# Altium PCB PCB1.PcbDoc
Units mm, origin at the board's own origin, x right, y up, seen from the top; angles counter-clockwise.
Board outline 28.75 x 26.75 mm, 2 copper layers (Top Layer, Bottom Layer); 12 components, 18 nets, 82 pads, 143 vias.
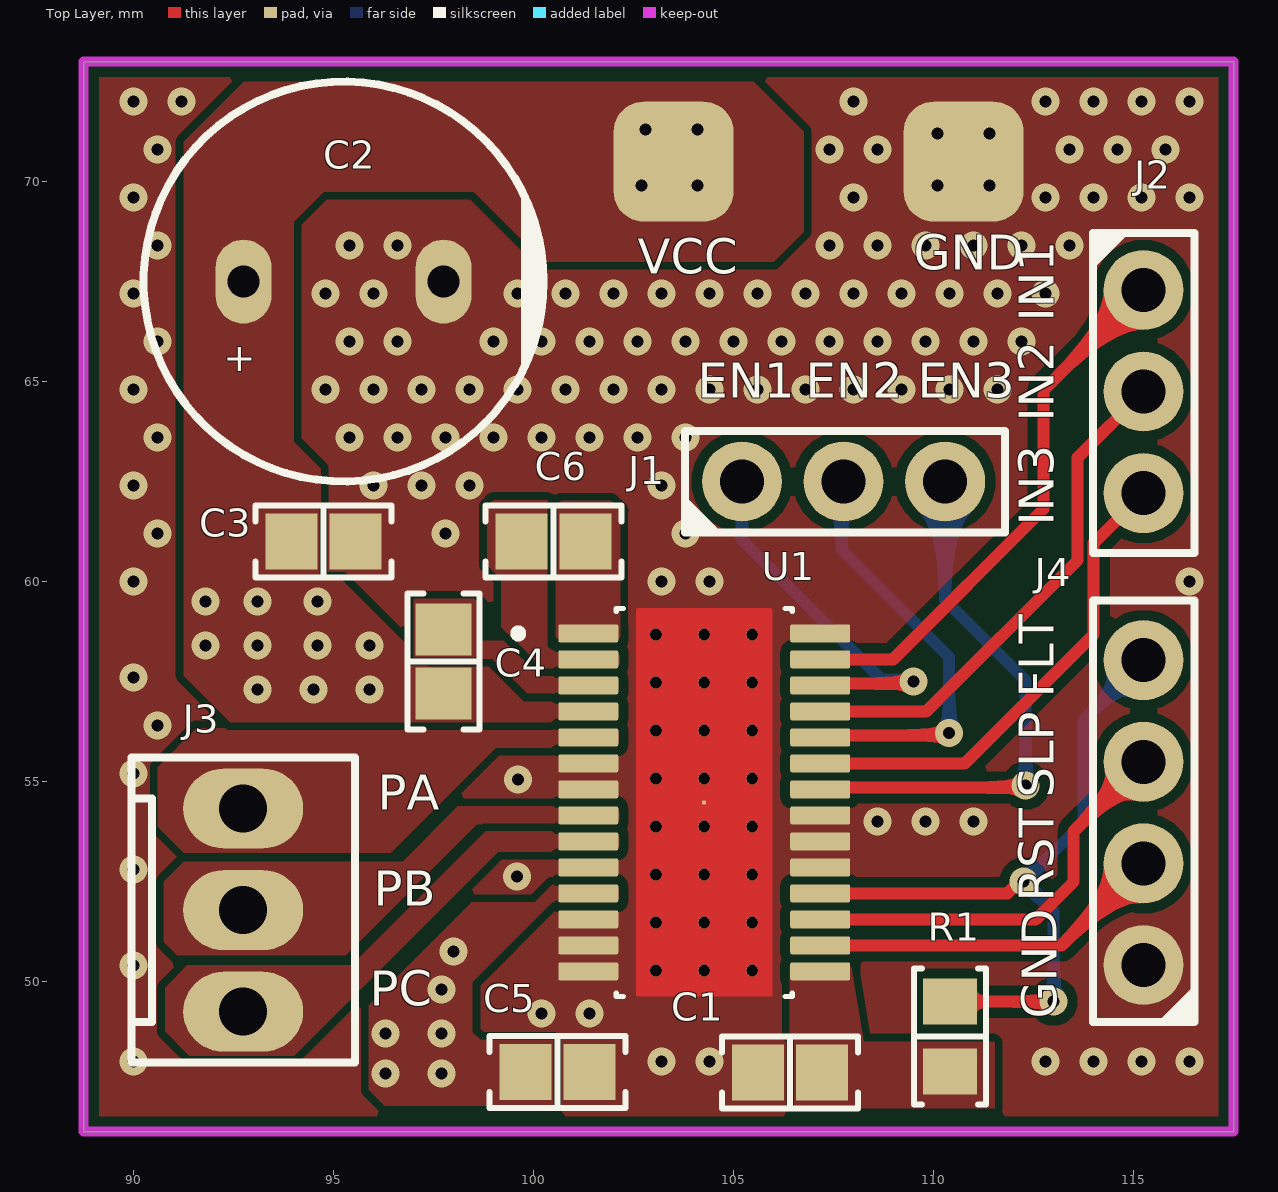
[diagram p0: Top Layer view]
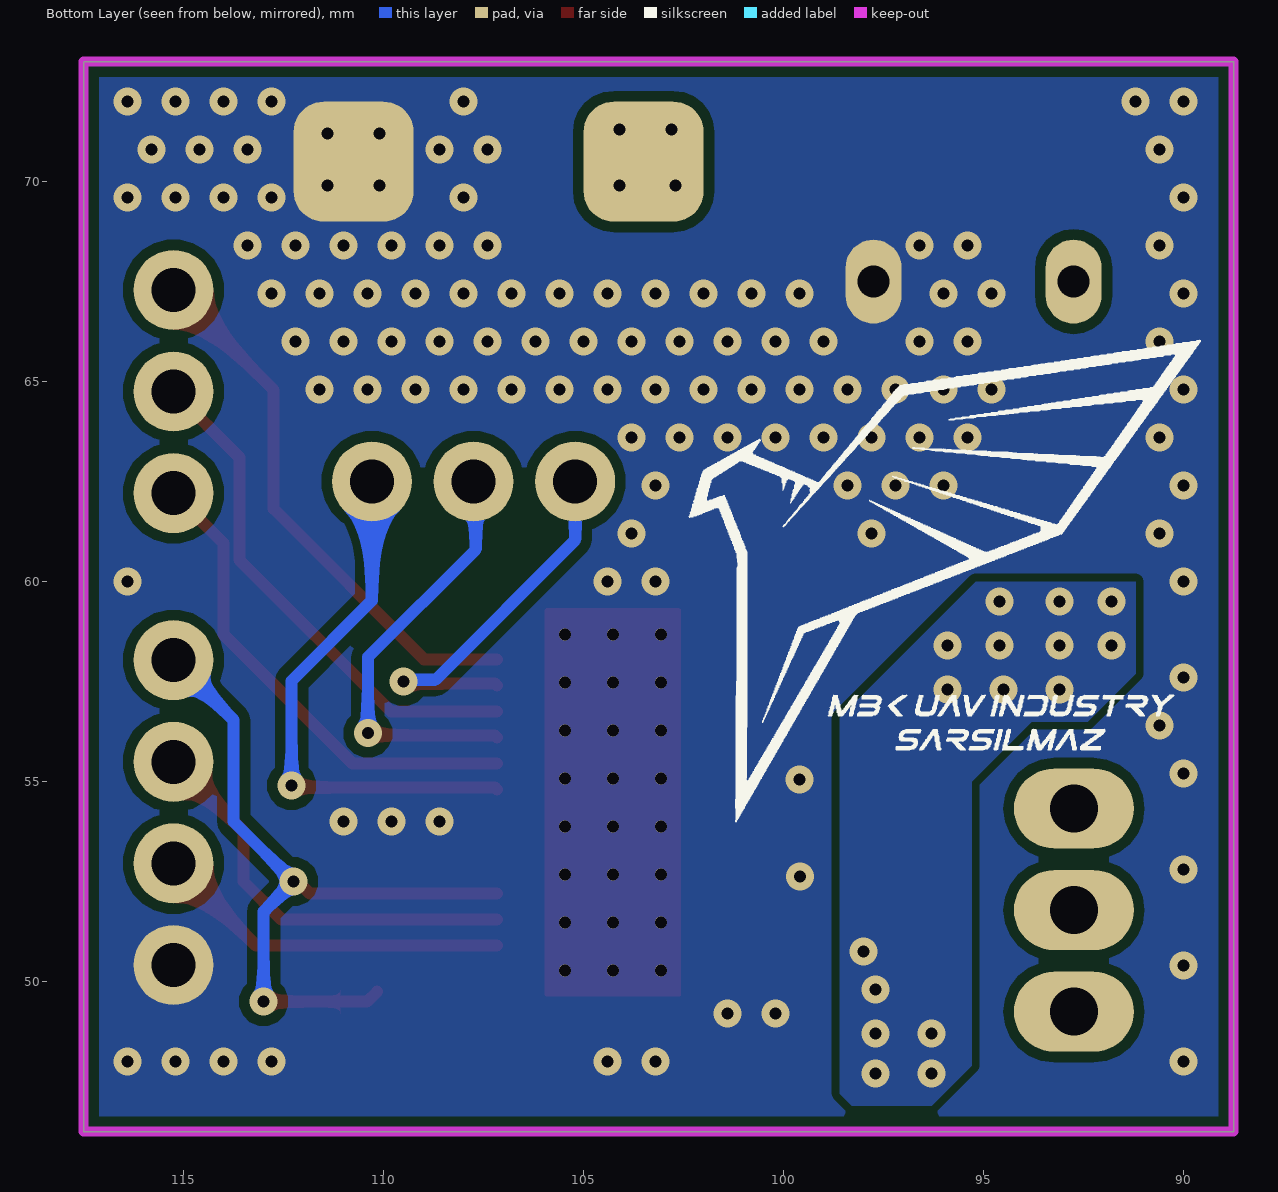
[diagram p1: Bottom Layer view, seen from below]
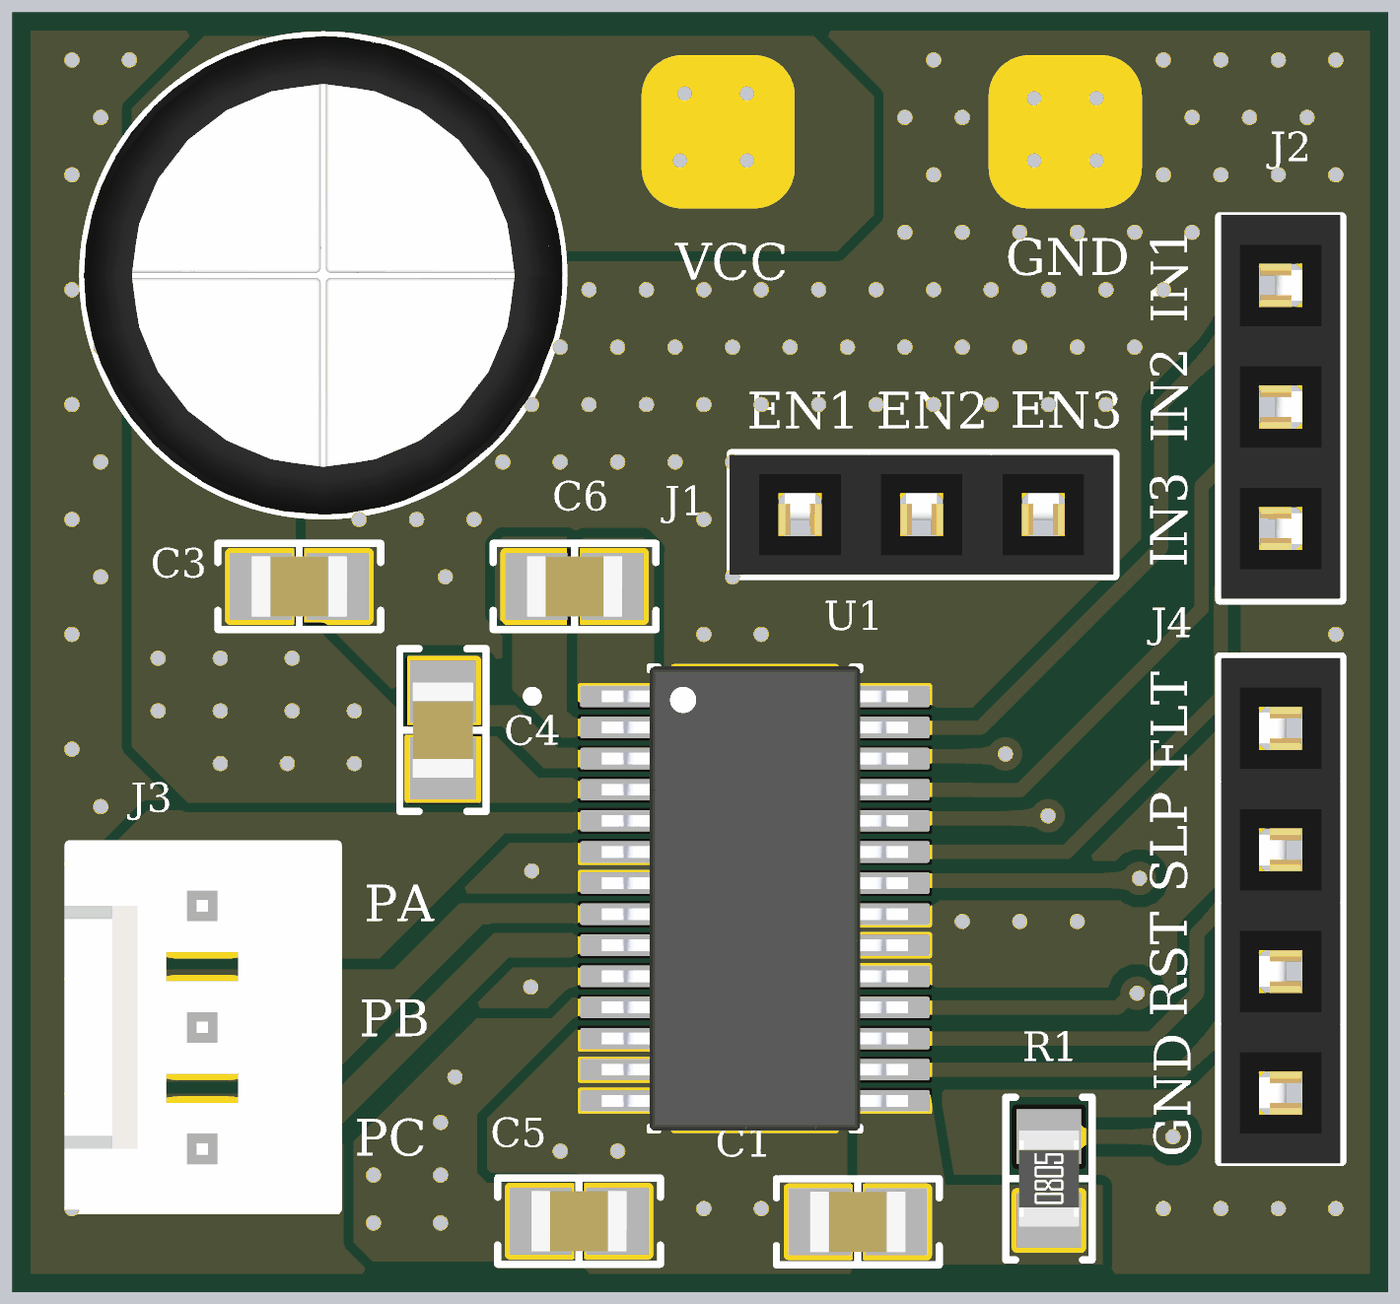
[diagram p2: 3D render of the assembled board from above, using the file's embedded part models]

## Layer stack, top to bottom
Top Solder: solder mask 0.0102, Solder Resist, Dk 3.5
Top Layer: signal copper 0.0356
Dielectric 1: dielectric 0.32, FR-4, Dk 4.8
Bottom Layer: signal copper 0.0356
Bottom Solder: solder mask 0.0102, Solder Resist, Dk 3.5

## Board outline
88.75,46.25 88.75,73 117.5,73 117.5,46.25

## Design rules (kind name [scope] priority, off if disabled: settings)
Clearance [All] p1: gap=0.254 ignorepadtopadclearanceinfootprint=TRUE except(0: Arc-Hole Track-Hole SMDPad-Hole THPad-Hole Via-Hole Fill-Hole Poly-Hole Region-Hole Text-Hole; 0.1: Arc-Arc Arc-Track Track-Track; 0.127: Arc-SMDPad Track-SMDPad; 0.2: Fill-Fill Fill-Poly Fill-Region Poly-Poly Poly-Region Region-Region)
MinimumSolderMaskSliver [All] p1: minsoldermaskwidth=0.01
PolygonConnect [All] p1: connectstyle=Direct reliefconductorwidth=0.254 reliefentries=4 polygonreliefangle="90 Angle" airgapwidth=0.254
RoutingVias [All] p1: holewidth=0.4 width=0.7 viastyle="Through Hole" minholewidth=0.3 minwidth=0.5 maxholewidth=0.711 maxwidth=1.27
ShortCircuit [All] p1: allowed=TRUE
SilkToSolderMaskClearance [IsPad] p1: minsilkscreentomaskgap=0.05 clearancetoexposedcopper=TRUE
SolderMaskExpansion [All] p1: expansion=0.102 istentingtop=FALSE
Width [All] p1: maxlimit=1 minlimit=0.254 preferedwidth=0.254 minimp=50.000000 maximp=50.000000 favimp=50.000000
27 further rules are at their usual default settings.

## Components (designator, comment, footprint, x,y, rotation, side; value= is the part's Value field where it differs from the comment)
C1 "0.47µF" "CAP 0805_2012" 106.417,47.724 r180 top
C2 "100µF" "CAP TH ALUM ELEC D10.00mm S5.00mm H12.50mm" 95.25,67.5 r180 top
C3 "0.1 µF" "CAP 0805_2012" 94.75,61 r0 top
C4 "0.1 µF" "CAP 0805_2012" 97.75,58 r90 top
C5 "0.1 µF" "CAP 0805_2012" 100.594,47.738 r0 top
C6 "10000 pF" "CAP 0805_2012" 100.5,61 r0 top
J1 "M20-7820342" "HARWIN M20-7820345" 107.75,62.5 r90 top
J2 "M20-7820342" "HARWIN M20-7820345" 115.25,64.75 r0 top
J3 "0022272031" "MOLEX KK 0022272031" 92.742,51.786 r270 top
J4 "M20-7820442" "HARWIN M20-7820445" 115.25,54.225 r180 top
R1 "10 kOhms" "RES 0805_2012" 110.409,48.628 r90 top
U1 "DRV8313PWP" DRV8313 104.267,54.478 r0 top

## Footprints (in the part's own frame and the unit in brackets; to place one, negate y for a bottom-side part, rotate by r counter-clockwise, add the part's x,y. Pads: shape width x height; smd on the part's side, far side on the other; paste and mask are expansions set on the pad)
"CAP 0805_2012" [mm] "Chip Capacitor, 2-Leads, Body 2.00x1.20mm, IPC Medium Density"
  rect 1.3x1.4 smd: 1(-0.8,0) 2(0.8,0)
  silkscreen extent -1.7,-0.9 1.7,0.9, body extent -1,-0.64 1,0.64, height 1.26
"CAP TH ALUM ELEC D10.00mm S5.00mm H12.50mm" [mm] "10mm Diameter 5mm Lead Spacing Aluminum Electrolytic Capacitors Radial, Can"
  oval 1.4x2.1 hole 0.8: 1(2.5,0) 2(-2.5,0)
  silkscreen extent -5,-5 5,5, body extent -5.01,-5 5,5, height 12.5
DRV8313 [mm]
  rrect20% 1.5x0.45 smd mask+0: 1(-2.9,4.225) 2(-2.9,3.575) 3(-2.9,2.925) 4(-2.9,2.275) 5(-2.9,1.625) 6(-2.9,0.975) 7(-2.9,0.325) 8(-2.9,-0.325) 9(-2.9,-0.975) 10(-2.9,-1.625) 11(-2.9,-2.275) 12(-2.9,-2.925) 13(-2.9,-3.575) 14(-2.9,-4.225) 15(2.9,-4.225) 16(2.9,-3.575) 17(2.9,-2.925) 18(2.9,-2.275) 19(2.9,-1.625) 20(2.9,-0.975) 21(2.9,-0.325) 22(2.9,0.325) 23(2.9,0.975) 24(2.9,1.625) 25(2.9,2.275) 26(2.9,2.925) 27(2.9,3.575) 28(2.9,4.225)
  rect 0.1x0.1 smd paste-1 mask+0: 29(0,0)
  round 0.3 hole 0.3 mask+0: 30(-1.2,4.2) 31(0,4.2) 32(1.2,4.2) 33(-1.2,3) 34(0,3) 35(1.2,3) 36(-1.2,1.8) 37(0,1.8) 38(1.2,1.8) 39(-1.2,0.6) 40(0,0.6) 41(1.2,0.6) 42(-1.2,-0.6) 43(0,-0.6) 44(1.2,-0.6) 45(-1.2,-1.8) 46(0,-1.8) 47(1.2,-1.8) 48(-1.2,-3) 49(0,-3) 50(1.2,-3) 51(-1.2,-4.2) 52(0,-4.2) 53(1.2,-4.2)
  Top Layer region: 1.658,4.849 1.66,4.849 1.663,4.848 1.665,4.848 1.668,4.847 1.67,4.846 1.673,4.845 1.675,4.843 1.677,4.842 1.679,4.84 1.681,4.839 1.683,4.837 1.685,4.835 1.687,4.833 1.689,4.831 1.69,4.829 1.692,4.827 1.693,4.825 1.695,4.823 1.696,4.82 1.697,4.818 1.698,4.815 1.698,4.813 1.699,4.81 1.699,4.808 1.7,4.805 1.7,4.803 1.7,4.8 1.7,-4.8 1.7,-4.803 1.7,-4.805 1.699,-4.808 1.699,-4.81 1.698,-4.813 1.698,-4.815 1.697,-4.818 1.696,-4.82 1.695,-4.823 1.693,-4.825 1.692,-4.827 1.69,-4.829 1.689,-4.831 1.687,-4.833 1.685,-4.835 1.683,-4.837 1.681,-4.839 1.679,-4.84 1.677,-4.842 1.675,-4.843 1.673,-4.845 1.67,-4.846 1.668,-4.847 1.665,-4.848 1.663,-4.848 1.66,-4.849 1.658,-4.849 1.655,-4.85 -1.655,-4.85 -1.658,-4.849 -1.66,-4.849 -1.663,-4.848 -1.665,-4.848 -1.668,-4.847 -1.67,-4.846 -1.673,-4.845 -1.675,-4.843 -1.677,-4.842 -1.679,-4.84 -1.681,-4.839 -1.683,-4.837 -1.685,-4.835 -1.687,-4.833 -1.689,-4.831 -1.69,-4.829 -1.692,-4.827 -1.693,-4.825 -1.695,-4.823 -1.696,-4.82 -1.697,-4.818 -1.698,-4.815 -1.698,-4.813 -1.699,-4.81 -1.699,-4.808 -1.7,-4.805 -1.7,-4.803 -1.7,-4.8 -1.7,4.8 -1.7,4.803 -1.7,4.805 -1.699,4.808 -1.699,4.81 -1.698,4.813 -1.698,4.815 -1.697,4.818 -1.696,4.82 -1.695,4.823 -1.693,4.825 -1.692,4.827 -1.69,4.829 -1.689,4.831 -1.687,4.833 -1.685,4.835 -1.683,4.837 -1.681,4.839 -1.679,4.84 -1.677,4.842 -1.675,4.843 -1.673,4.845 -1.67,4.846 -1.668,4.847 -1.665,4.848 -1.663,4.848 -1.66,4.849 -1.658,4.849 -1.655,4.85 1.655,4.85
  silkscreen extent -4.75,-4.85 2.2,4.85, body extent -3.2,-4.85 3.2,4.85, height 1.2
"HARWIN M20-7820345" [mm] "2.54mm DIL PC TAIL PIN HEADER ASSEMBLY"
  round 2 hole 1.1: 1(0,2.54) 2(0,0) 3(0,-2.54)
  silkscreen extent -1.27,-4.03 1.27,4, body extent -1.25,-4.01 1.25,4.01, height 8.5
"HARWIN M20-7820445" [mm] "2.54mm DIL PC TAIL PIN HEADER ASSEMBLY"
  round 2 hole 1.1: 1(0,3.81) 2(0,1.27) 3(0,-1.27) 4(0,-3.81)
  silkscreen extent -1.27,-5.3 1.27,5.27, body extent -1.25,-5.28 1.25,5.28, height 8.5
"MOLEX KK 0022272031" [mm]
  oval 2x3 hole 1.2: 1(-2.54,0) 2(0,0) 3(2.54,0)
  silkscreen extent -3.81,-2.79 3.81,2.79, body extent -3.81,-2.9 3.81,2.9, height 11.7
"RES 0805_2012" [mm] "Chip Resistor, 2-Leads, Body 2.00x1.25mm, IPC Medium Density"
  rect 1.15x1.35 smd: 1(-0.875,0) 2(0.875,0)
  silkscreen extent -1.7,-0.9 1.7,0.9, body extent -1,-0.62 1,0.63, height 0.6

## Part data
C1: library part MM053C474KCZ2A, "CAP CER 0.47UF 25V X7R 0805", Device Package="0805 (2012 Metric)", Manufacturer="AVX Corporation", Operating Temperature="-55°C ~ 125°C", Supplier Part Number 1=478-10610-1-ND, Temperature Coefficient=X7R, Tolerance=±10%, Voltage - Rated=25V, Applications="Medical, Non-Critical", Capacitance=0.47µF, ComponentLink1Description=Datasheet, ComponentLink1URL=http://datasheets.avx.com/AVX-MM.pdf, componentlink2description="DigiKey Link", componentlink2url=http://digikey.com/product-detail/en/avx-corporation/MM053C474KCZ2A/478-10610-1-ND/7344871, lastupdated="2.09.2020 01:04:42", Lifecycle Status=Active, Minimum Order=1, Mounting Type="Surface Mount, MLCC", Package / Case="0805 (2012 Metric)", Packaging=TapeAndReel, Part Number=MM053C474KCZ2A, Part Status=Active, partid=2443, price=0.50, Series=MM, Size / Dimension="0.079\" L x 0.049\" W (2.01mm x 1.25mm)", Supplier 1=DigiKey, Thickness (Max)="0.029\" (0.74mm)"
C2: library part EEU-FC1H101, "CAP ALUM 100UF 20% 50V RADIAL", Device Package="Radial, Can", Lifetime @ Temp.="3000 Hrs @ 105°C", Manufacturer="Panasonic Electronic Components", Operating Temperature="-55°C ~ 105°C", Ratings=AEC-Q200, Ripple Current @ High Frequency="615mA @ 100kHz", Ripple Current @ Low Frequency="399.75mA @ 120Hz", Supplier Part Number 1=P10323-ND, Tolerance=±20%, Voltage - Rated=50V, Applications=Automotive, Capacitance=100µF, ComponentLink1Description=Datasheet, ComponentLink1URL=http://industrial.panasonic.com/www-cgi/jvcr13pz.cgi?E+PZ+3+ABA0022+EEUFC1H101+7+WW, componentlink2description="DigiKey Link", componentlink2url=http://digikey.com/product-detail/en/panasonic-electronic-components/EEU-FC1H101/P10323-ND/266332, Height - Seated (Max)="0.492\" (12.50mm)", lastupdated="2.09.2020 01:31:04", Lead Spacing="0.197\" (5.00mm)", Lifecycle Status=Active, Minimum Order=1, Mounting Type="Through Hole", Package / Case="Radial, Can", Packaging=Bulk, Part Number=EEU-FC1H101, Part Status=Active, partid=10735, Polarization=Polar, price=0.48, Series=FC, Size / Dimension="0.394\" Dia (10.00mm)", Supplier 1=DigiKey, Impedance="162 mOhms"
C3 C4 C5: library part 0805B104K250CT, "CAP CER 0.1UF 25V X7R 0805", Device Package="0805 (2012 Metric)", Manufacturer="Walsin Technology Corporation", Operating Temperature="-55°C ~ 125°C", Supplier Part Number 1=1292-1566-1-ND, Temperature Coefficient=X7R, Tolerance=±10%, Voltage - Rated=25V, Applications="General Purpose", Capacitance="0.1 µF", ComponentLink1Description=Datasheet, ComponentLink1URL=http://www.passivecomponent.com/wp-content/uploads/2018/10/MLCC.pdf, componentlink2description="DigiKey Link", componentlink2url=https://www.digikey.com/en/products/detail/walsin-technology-corporation/0805B104K250CT/9355063, lastupdated="17.06.2023 19:19:53", Lifecycle Status=Active, Minimum Order=1, Mounting Type="Surface Mount, MLCC", Package / Case="0805 (2012 Metric)", Packaging=TapeAndReel, Part Number=0805B104K250CT, Part Status=Active, partid=4879, price=0.01, Series=-, Size / Dimension="0.079\" L x 0.049\" W (2.00mm x 1.25mm)", Supplier 1=DigiKey, Thickness (Max)="0.035\" (0.90mm)"
C6: library part C0805C103J3GECAUTO, "CAP CER 0805 10NF 25V C0G 5%", Device Package="0805 (2012 Metric)", Manufacturer=KEMET, Operating Temperature="-55°C ~ 125°C", Ratings=AEC-Q200, Supplier Part Number 1=399-C0805C103J3GECAUTOCT-ND, Temperature Coefficient="C0G, NP0", Tolerance=±5%, Voltage - Rated=25V, Applications="Automotive, ESD Protection", Capacitance="10000 pF", ComponentLink1Description=Datasheet, ComponentLink1URL=https://api.kemet.com/component-edge/download/datasheet/C0805C103J3GECAUTO.pdf, componentlink2description="DigiKey Link", componentlink2url=https://www.digikey.com/en/products/detail/kemet/C0805C103J3GECAUTO/8647361, Features="Low ESL", lastupdated="17.06.2023 19:18:54", Lifecycle Status=Active, Minimum Order=1, Mounting Type="Surface Mount, MLCC", Package / Case="0805 (2012 Metric)", Packaging=TapeAndReel, Part Number=C0805C103J3GECAUTO, Part Status=Active, partid=32681, price=0.05, Series="ESD SMD Auto C0G", Size / Dimension="0.079\" L x 0.049\" W (2.00mm x 1.25mm)", Supplier 1=DigiKey, Thickness (Max)="0.039\" (1.00mm)"
J1 J2: "CONN RCPT 3POS 0.1 GOLD PCB", Current Rating (Amps)=3A, Manufacturer="Harwin Inc.", Material Flammability Rating="UL94 V-0", Operating Temperature="-40°C ~ 105°C", Supplier Part Number 1=952-1783-ND, Insulation Color=Black, ComponentLink1Description=Datasheet, ComponentLink1URL=https://cdn.harwin.com/pdfs/Harwin_PC_Connectors_M20.pdf, componentlink2description="DigiKey Link", componentlink2url=https://www.digikey.com/en/products/detail/harwin-inc/M20-7820342/3727752, Connector Type=Receptacle, Contact Finish - Mating=Gold, Contact Finish - Post=Tin, Contact Finish Thickness - Mating=Flash, Contact Length - Post="0.118\" (3.00mm)", Contact Type="Female Socket", Fastening Type=Push-Pull, lastupdated="21.09.2022 18:55:13", Lifecycle Status=Active, Mated Stacking Heights="11.04mm, 12.63mm", Minimum Order=1, Mounting Type="Through Hole", Number of Positions=3, Number of Positions Loaded=All, Number of Rows=1, Packaging=Tube, Part Number=M20-7820342, Part Status=Active, Pitch - Mating="0.100\" (2.54mm)", price=0.42, Series=M20, Style="Board to Board or Cable", Supplier 1=DigiKey, Termination=Solder, Insulation Height="0.335\" (8.51mm)"
J3: "CONN HEADER VERT 3POS 2.54MM", Manufacturer=Molex, Material Flammability Rating="UL94 V-0", Supplier Part Number 1=WM4112-ND, Insulation Color=Natural, ComponentLink1Description=Datasheet, ComponentLink1URL=https://www.molex.com/pdm_docs/sd/022272031_sd.pdf, componentlink2description="DigiKey Link", componentlink2url=http://digikey.com/product-detail/en/molex/0022272031/WM4112-ND/1130578, Connector Type=Header, Contact Finish - Mating=Tin, Contact Finish - Post=Tin, Contact Finish Thickness - Mating="100.0µin (2.54µm)", Contact Length - Mating="0.295\" (7.49mm)", Contact Length - Post="0.140\" (3.56mm)", Contact Material=Brass, Contact Shape=Square, Contact Type="Male Pin", Fastening Type="Friction Lock", lastupdated="12.01.2020 23:51:54", Lifecycle Status=Active, Minimum Order=1, Mounting Type="Through Hole", Number of Positions=3, Number of Positions Loaded=All, Number of Rows=1, Overall Contact Length="0.560\" (14.22mm)", Packaging=Bulk, Part Number=0022272031, Part Status=Active, partid=77, Pitch - Mating="0.100\" (2.54mm)", price=0.37, Series="KK 6410", Shrouding="Shrouded - 1 Wall", Style="Board to Cable/Wire", Supplier 1=DigiKey, Termination=Solder, Insulation Height="0.461\" (11.70mm)", Insulation Material="Polyamide (PA), Nylon"
J4: "CONN RCPT 4POS 0.1 GOLD PCB", Current Rating (Amps)=3A, Manufacturer="Harwin Inc.", Material Flammability Rating="UL94 V-0", Operating Temperature="-40°C ~ 105°C", Supplier Part Number 1=952-1791-ND, Insulation Color=Black, ComponentLink1Description=Datasheet, ComponentLink1URL=https://cdn.harwin.com/pdfs/Harwin_PC_Connectors_M20.pdf, componentlink2description="DigiKey Link", componentlink2url=https://www.digikey.com/en/products/detail/harwin-inc/M20-7820442/3727760, Connector Type=Receptacle, Contact Finish - Mating=Gold, Contact Finish - Post=Tin, Contact Finish Thickness - Mating=Flash, Contact Length - Post="0.118\" (3.00mm)", Contact Type="Female Socket", Fastening Type=Push-Pull, lastupdated="21.09.2022 18:57:11", Lifecycle Status=Active, Mated Stacking Heights="11.04mm, 12.63mm", Minimum Order=1, Mounting Type="Through Hole", Number of Positions=4, Number of Positions Loaded=All, Number of Rows=1, Packaging=Tube, Part Number=M20-7820442, Part Status=Active, Pitch - Mating="0.100\" (2.54mm)", price=0.45, Series=M20, Style="Board to Board or Cable", Supplier 1=DigiKey, Termination=Solder, Insulation Height="0.335\" (8.51mm)"
R1: library part RNCP0805FTD10K0, "RES 10K OHM 1% 1/4W 0805", Device Package="0805 (2012 Metric)", Manufacturer="Stackpole Electronics Inc", Operating Temperature="-55°C ~ 155°C", Power (Watts)="0.25W, 1/4W", Supplier Device Package=0805, Supplier Part Number 1=RNCP0805FTD10K0CT-ND, Temperature Coefficient=±100ppm/°C, Tolerance=±1%, ComponentLink1Description=Datasheet, ComponentLink1URL=https://www.seielect.com/catalog/sei-rncp.pdf, componentlink2description="DigiKey Link", componentlink2url=https://www.digikey.com/en/products/detail/stackpole-electronics-inc/RNCP0805FTD10K0/2240262, Composition="Thin Film", Features=Anti-Sulfur, Height - Seated (Max)="0.025\" (0.65mm)", lastupdated="17.06.2023 19:59:23", Lifecycle Status=Active, Minimum Order=1, Number of Terminations=2, Package / Case="0805 (2012 Metric)", Packaging=TapeAndReel, Part Number=RNCP0805FTD10K0, Part Status=Active, partid=28021, price=0.01, Resistance="10 kOhms", Series=RNCP, Size / Dimension="0.079\" L x 0.049\" W (2.00mm x 1.25mm)", Supplier 1=DigiKey
U1: "Motor Driver Power MOSFET Parallel 28-HTSSOP", Case/Package=HTSSOP, Manufacturer="Texas Instruments", Manufacturer Part Number=DRV8313PWPR, Max Operating Temperature=125°C, Max Supply Voltage=60V, Min Operating Temperature=-40°C, Min Supply Voltage=8V, Output Current=1.75A, Package Quantity=2000, Supplier Part Number 1=595-DRV8313PWPR, Category="Motor Drivers", ComponentLink1Description=https://datasheet.ciiva.com/24105/slvsba5a-261520-24105611.pdf?src-supplier=Mouser, ComponentLink1URL=https://datasheet.ciiva.com/24105/slvsba5a-261520-24105611.pdf?src-supplier=Mouser, componentlink2description=https://datasheet.ciiva.com/6607/drv8313-6607795.pdf?src-supplier=Digi-Key, componentlink2url=https://datasheet.ciiva.com/6607/drv8313-6607795.pdf?src-supplier=Digi-Key, Lead Free="Lead Free", Mount="Surface Mount", Number of Outputs=1, Number of Pins=28, Packaging="Tape and Reel", Pricing 1="1=3,73, 10=3,35, 50=3,16, 100=2,74, 1000=1,99, 10000=1,92 (USD)", RoHS=Yes, RoHS Compliant=Yes, Series=-, Stock 1=1916, Supplier 1=Mouser, Interface=Parallel

## Free pads (board coordinates)
  rrect50% 3x3 all layers, no hole: 4(110.75,70.5) 5(103.5,70.5)

## Via types
v1: diameter 0.7, hole 0.3, Top Layer to Bottom Layer, tented both sides, 135 vias
v2: diameter 0.7, hole 0.3, Top Layer to Bottom Layer, 8 vias

## Nets (pads, with @x,y where several pads share a name; then routed paths per layer and width w, separated by ;. In a path a pad name is that pad's centre, name@x,y a point inside that pad or via, vN(x,y) a via of type N, cw(c..) or ccw(c..) an arc to the next point about the centre after c; other vN are vias at no path point)
EN1: J1.1 U1.26 | length 9.6
  Top Layer w0.3: U1.26 107.215,57.452 109.452,57.452 v1(109.5,57.5)
  Bottom Layer w0.3: J1.1 105.21,61.04 108.7,57.55 109.45,57.55 v1(109.5,57.5)
EN2: J1.2 U1.24 | length 10.7
  Top Layer w0.3: U1.24 107.22,56.156 110.339,56.156 v1(110.392,56.208)
  Bottom Layer w0.3: J1.2 107.7,62.45 107.7,60.8 110.392,58.108 v1(110.392,56.208)
EN3: J1.3 U1.22 | length 13.6
  Top Layer w0.3: U1.22 107.215,54.852 112.252,54.852 v1(112.3,54.9)
  Bottom Layer w0.3: J1.3 110.29,59.529 112.3,57.519 v1(112.3,54.9)
GND: C1.2 C2.2 C3.2 C5.2 J4.1 pad.4 U1.6 U1.7 U1.10 U1.12 U1.13 U1.14 U1.19 U1.20 U1.21 U1.28 U1.29 U1.30 U1.31 U1.32 U1.33 U1.34 U1.35 U1.36 U1.37 U1.38 U1.39 U1.40 U1.41 U1.42 U1.43 U1.44 U1.45 U1.46 U1.47 U1.48 U1.49 U1.50 U1.51 U1.52 U1.53
  other v1: 90,48 103.2,48 104.4,48 112.8,48 114,48 115.2,48 116.4,48 100.2,49.2 101.4,49.2 90,50.4 99.584,52.63 90,52.8 108.6,54 109.8,54 111,54 99.605,55.055 90,55.2 90.6,56.4 90,57.6 90,60 103.2,60 104.4,60 116.4,60 90.6,61.2 97.8,61.2 103.8,61.2 90,62.4 96,62.4 97.2,62.4 98.4,62.4 103.2,62.4 90.6,63.6 95.4,63.6 96.6,63.6 97.8,63.6 99,63.6 100.2,63.6 101.4,63.6 102.6,63.6 103.8,63.6 90,64.8 94.8,64.8 96,64.8 97.2,64.8 98.4,64.8 99.6,64.8 100.8,64.8 102,64.8 103.2,64.8 104.4,64.8 105.6,64.8 106.8,64.8 108,64.8 109.2,64.8 110.4,64.8 111.6,64.8 90.6,66 95.4,66 96.6,66 99,66 100.2,66 101.4,66 102.6,66 103.8,66 105,66 106.2,66 107.4,66 108.6,66 109.8,66 111,66 112.2,66 90,67.2 94.8,67.2 96,67.2 99.6,67.2 100.8,67.2 102,67.2 103.2,67.2 104.4,67.2 105.6,67.2 106.8,67.2 108,67.2 109.2,67.2 110.4,67.2 111.6,67.2 112.8,67.2 90.6,68.4 95.4,68.4 96.6,68.4 107.4,68.4 108.6,68.4 109.8,68.4 111,68.4 112.2,68.4 113.4,68.4 90,69.6 108,69.6 112.8,69.6 114,69.6 115.2,69.6 116.4,69.6 90.6,70.8 107.4,70.8 108.6,70.8 113.4,70.8 114.6,70.8 115.8,70.8 90,72 91.2,72 108,72 112.8,72 114,72 115.2,72 116.4,72
  other v2: 110.1,69.9 111.4,69.9 110.1,71.2 111.4,71.2
IN1: J2.1 U1.27 | length 13.7
  Top Layer w0.3: U1.27 108.987,58.053 112.75,61.816 112.75,64.79 J2.1
IN2: J2.2 U1.25 | length 12.9
  Top Layer w0.3: U1.25 108.786,56.753 108.793,56.746 109.812,56.746 113.601,60.534 113.601,63.101 J2.2
IN3: J2.3 U1.23 | length 12.2
  Top Layer w0.3: U1.23 110.778,55.453 114.001,58.676 114.001,60.961 J2.3
NetC1_1: C1.1 R1.1 U1.15
NetC2_1: C2.1 C3.1 C4.1 C5.1 pad.5 U1.4 U1.11
  other v1: 96.3,47.7 97.7,47.7 96.3,48.7 97.7,48.7 97.7,49.8 98,50.75 93.1,57.3 94.5,57.3 95.9,57.3 91.8,58.4 93.1,58.4 94.6,58.4 95.9,58.4 91.8,59.5 93.1,59.5 94.6,59.5
  other v2: 102.7,69.9 104.1,69.9 102.8,71.3 104.1,71.3
NetC4_2: C4.2 U1.3
NetC6_1: C6.1 U1.2
NetC6_2: C6.2 U1.1
nFault: J4.4 R1.2 U1.18 | length 18.2
  Top Layer w0.3: U1.18 111.845,52.203 112.142,52.5 v1(112.25,52.5) ; R1.2@110.162,49.75 R1.2 110.412,49.5 v1(113,49.5)
  Bottom Layer w0.3: v1(113,49.5) 113,51.75 v1(112.25,52.5) 113.75,54 113.75,56.54 J4.4@115.25,58.04
nReset: J4.2 U1.16 | length 8.9
  Top Layer w0.3: U1.16 113.193,50.903 J4.2@115.25,52.96
nSleep: J4.3 U1.17 | length 10.5
  Top Layer w0.3: U1.17 112.553,51.553 113.5,52.5 113.5,53.75 J4.3@115.25,55.5
OUT1: J3.1 U1.5
OUT2: J3.2 U1.8
OUT3: J3.3 U1.9

## Polygon pours and split planes (outlines as drawn)
GND on Top Layer "GND_L01_P014" (solid, remove dead copper, pour order 14): 88.9,72.8 117.4,72.8 117.4,46.4 88.9,46.4
NetC2_1 on Top Layer "NETC2_1_L01_P011" (solid, pour order 11): 102.137,52.425 102.126,52.414 102.126,51.98 100.467,51.98 98.47,49.983 98.47,48.737 98.664,48.543 100.508,48.543 100.508,46.893 96.281,46.893 95.882,47.292 95.882,49.406 98.456,51.98 100.03,51.98 100.465,52.414 102.104,52.414
NetC6_1 on Top Layer "NETC6_1_L01_P008" (solid, pour order 8): 100.622,58.296 102.142,58.296 102.148,58.29 102.148,57.811 102.136,57.798 100.253,57.798 99.192,58.859 99.192,60.056 98.836,60.412 98.836,61.88 98.992,62.036 100.343,62.036 100.343,58.387 100.473,58.277 100.609,58.277
NetC4_2 on Top Layer "NETC4_2_L01_P007" (solid, pour order 7): 100.615,57.637 100.622,57.63 102.123,57.63 102.123,57.19 102.064,57.132 99.917,57.132 98.972,58.077 97.018,58.077 97.006,58.064 97.006,59.545 97.031,59.571 98.493,59.571 98.5,59.577 98.675,59.403 98.675,58.523 99.257,58.523 100.15,57.63 100.628,57.63
NetC6_2 on Top Layer "NETC6_2_L01_P006" (solid, pour order 6): 102.161,61.751 102.181,61.77 101.928,62.023 100.667,62.023 100.492,61.848 100.557,61.783 100.557,58.432 102.135,58.432 102.161,58.458
OUT1 on Top Layer "OUT1_L01_P005" (solid, pour order 5): 100.614,56.329 100.624,56.339 102.135,56.339 102.135,55.846 99.052,55.846 96.433,53.226 91.255,53.226 90.607,53.873 90.607,55.363 91.573,56.329
OUT2 on Top Layer "OUT2_L01_P004" (solid, pour order 4): 100.616,54.388 102.12,54.388 102.142,54.367 102.142,53.894 102.099,53.938 98.586,53.938 95.303,50.656 91.087,50.656 90.75,50.993 90.75,52.5 91.25,53 96.725,53 98.102,54.378 100.616,54.378 100.627,54.367
OUT3 on Top Layer "OUT3_L01_P003" (solid, pour order 3): 100.595,53.748 102.132,53.748 102.137,53.743 102.137,53.249 99.12,53.249 94.015,48.144 91.395,48.144 90.786,48.753 90.786,49.846 91.346,50.405 95.452,50.405 98.805,53.759 100.589,53.759
NetC1_1 on Top Layer "NETC1_1_L01_P001" (solid, pour order 1): 106.403,50.487 106.403,46.83 111.52,46.83 111.529,46.821 111.529,48.471 111.5,48.5 108.25,48.5 107.919,50.484 106.456,50.538 106.403,50.484
NetC2_1 on Top Layer "NETC2_1_L01_P000" (solid, pour order 0): 100.503,56.98 100.523,56.999 102.111,56.999 102.111,56.482 92.418,56.482 91.25,57.65 91.25,71 92.75,72.5 105.5,72.5 106.75,71.25 106.75,68.75 106,68 100.25,68 98.5,69.75 94.75,69.75 94,69 94,63.5 94.675,62.825 94.675,60.575 97.382,57.868 98.882,57.868 99.5,57.25 99.75,57 102.25,57
GND on Bottom Layer "GND_L02_P013" (solid, remove dead copper, pour order 13): 88.9,72.8 117.4,72.8 117.4,46.4 88.9,46.4
NetC2_1 on Bottom Layer "NETC2_1_L02_P012" (solid, pour order 12): 91.2,60 95.2,60 98.6,56.6 98.6,47.2 98.3,46.9 96.3,46.9 95.3,47.9 95.3,55 93.8,56.5 92.4,56.5 91.2,57.7

## Keep-outs
Keep-Out Layer:
  the board outline again, w0.254

## Silkscreen, mask and mechanical layers (free items; w line width, h text height)
Top Overlay:
  text "GND" at 109.5,67.51 h1.5
  text "VCC" at 102.6,67.409 h1.5
  text "IN1" at 113.297,66.5 h1.5 r90
  text "EN1" at 104.1,64.303 h1.5
  text "EN2" at 106.8,64.303 h1.5
  text "EN3" at 109.6,64.311 h1.5
  text "IN2" at 113.297,64 h1.5 r90
  text "IN3" at 113.289,61.4 h1.5 r90
  text "FLT" at 113.297,57.1 h1.5 r90
  text "SLP" at 113.289,54.6 h1.5 r90
  text "PA" at 96.1,54.003 h1.5
  text "RST" at 113.289,52 h1.5 r90
  text "PB" at 96,51.603 h1.5
  text "PC" at 95.9,49.109 h1.5
  text "GND" at 113.365,49.075 h1.5 r90
Bottom Overlay:
  drawing of 24 lines, arcs and shapes, not listed

## Text inside footprints (layer, text, board x,y; h text height)
C2: Top Overlay "+" at 93.05,66.1 h1.2 r180